# Altium PCB DualBuck(Double).PcbDoc
Units mm, origin at the board's own origin, x right, y up, seen from the top; angles counter-clockwise.
Board outline 92.71 x 77.47 mm, 4 copper layers (Top Layer, GND, PWR, Bottom Layer), stack 0.603 mm thick; 41 components, 27 nets, 143 pads, 53 vias.
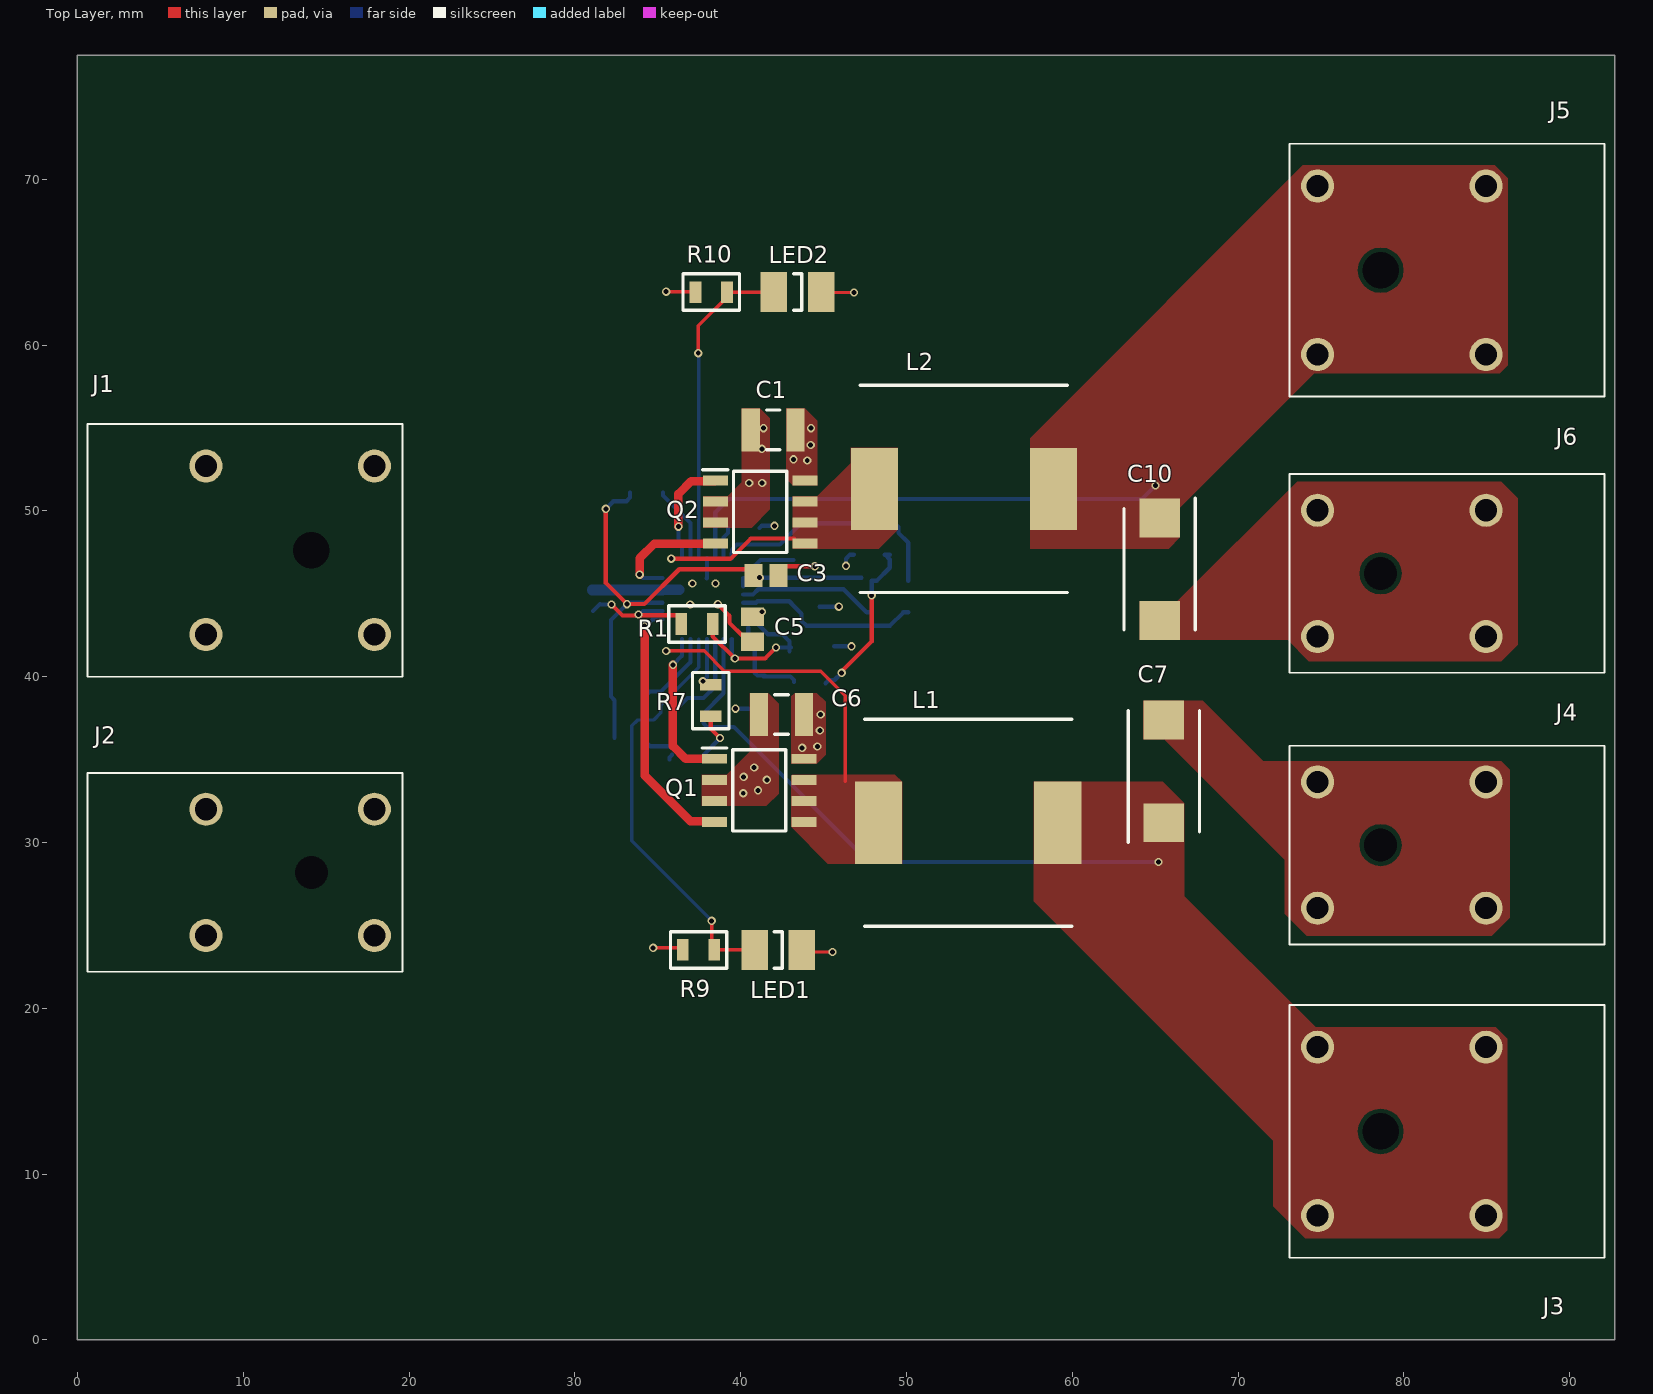
[diagram p0: Top Layer view]
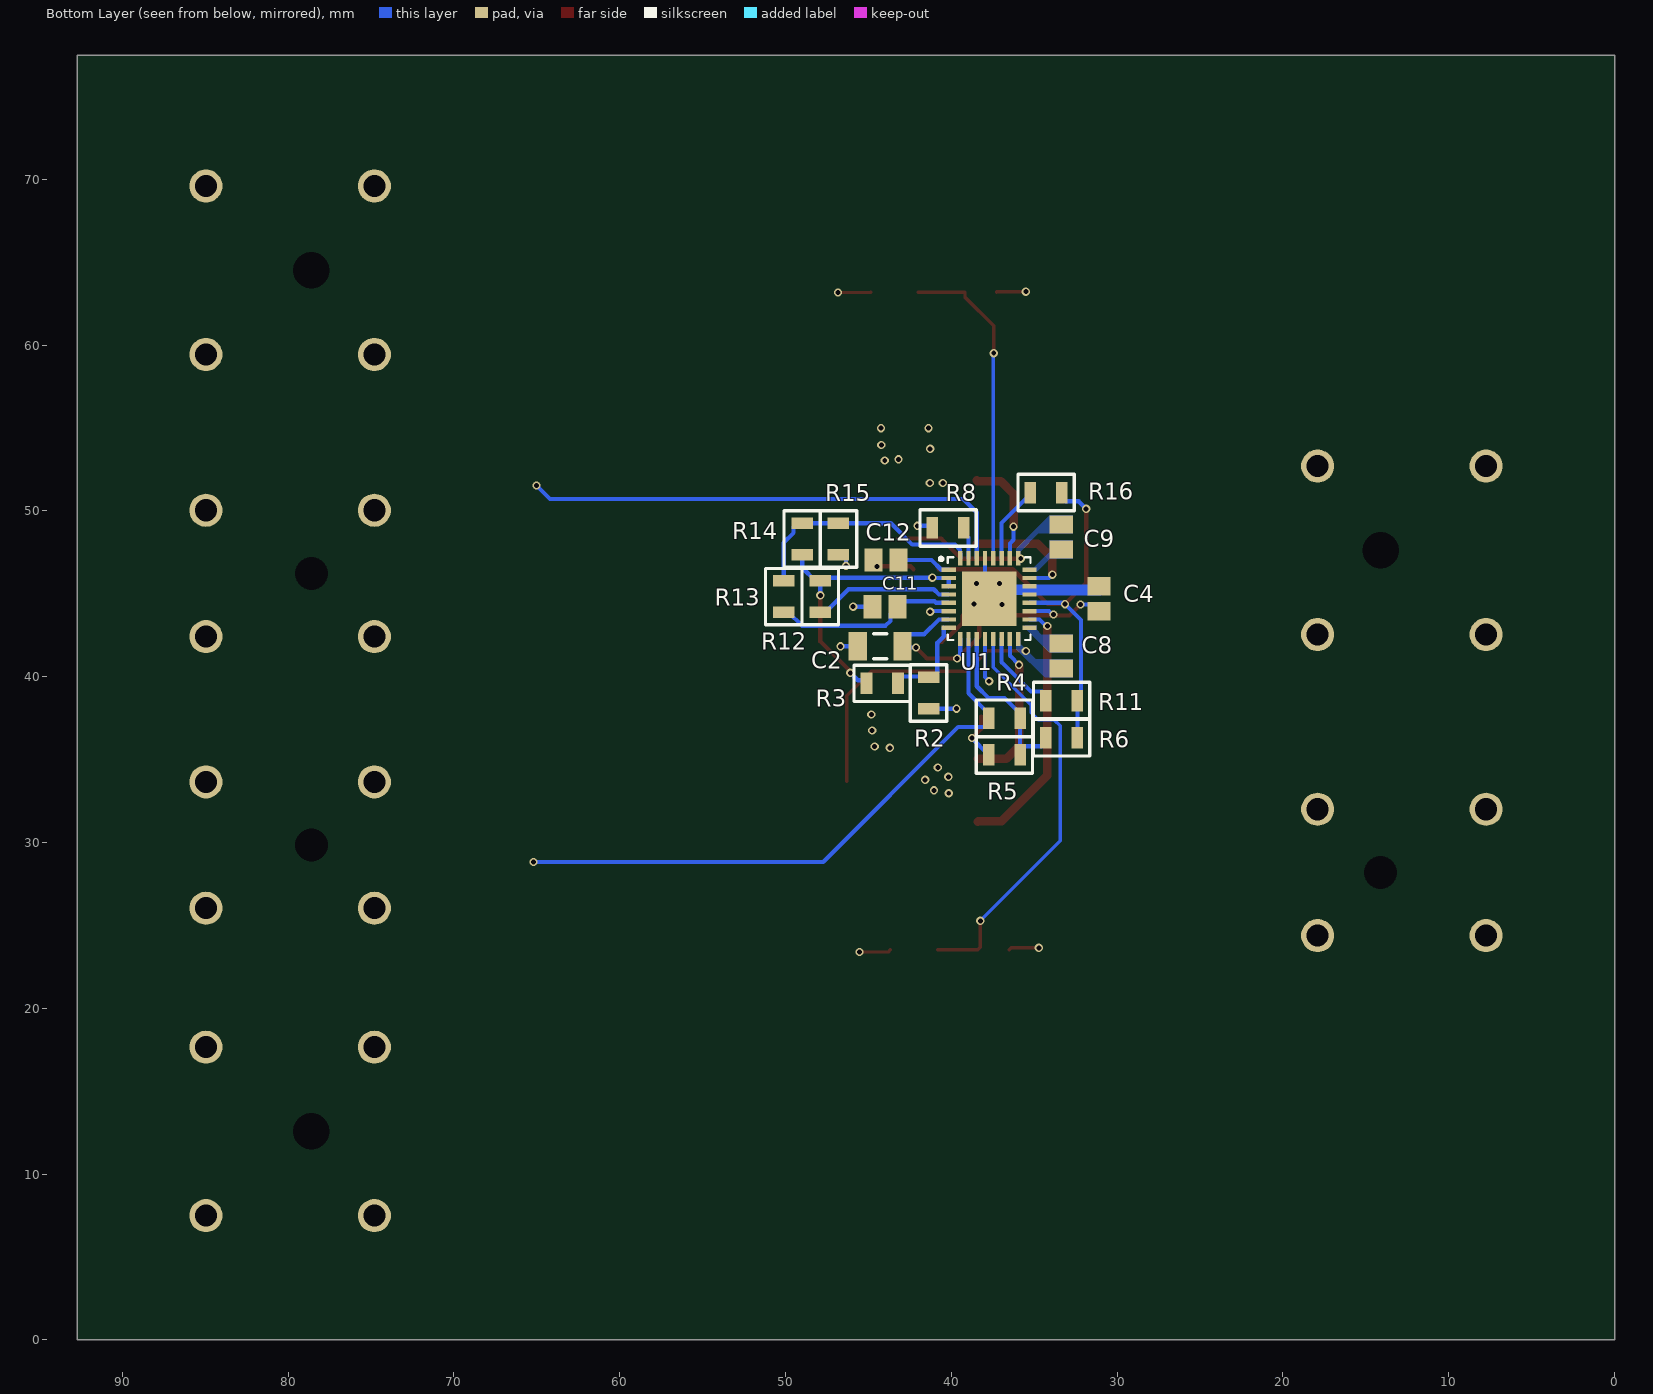
[diagram p1: Bottom Layer view, seen from below]
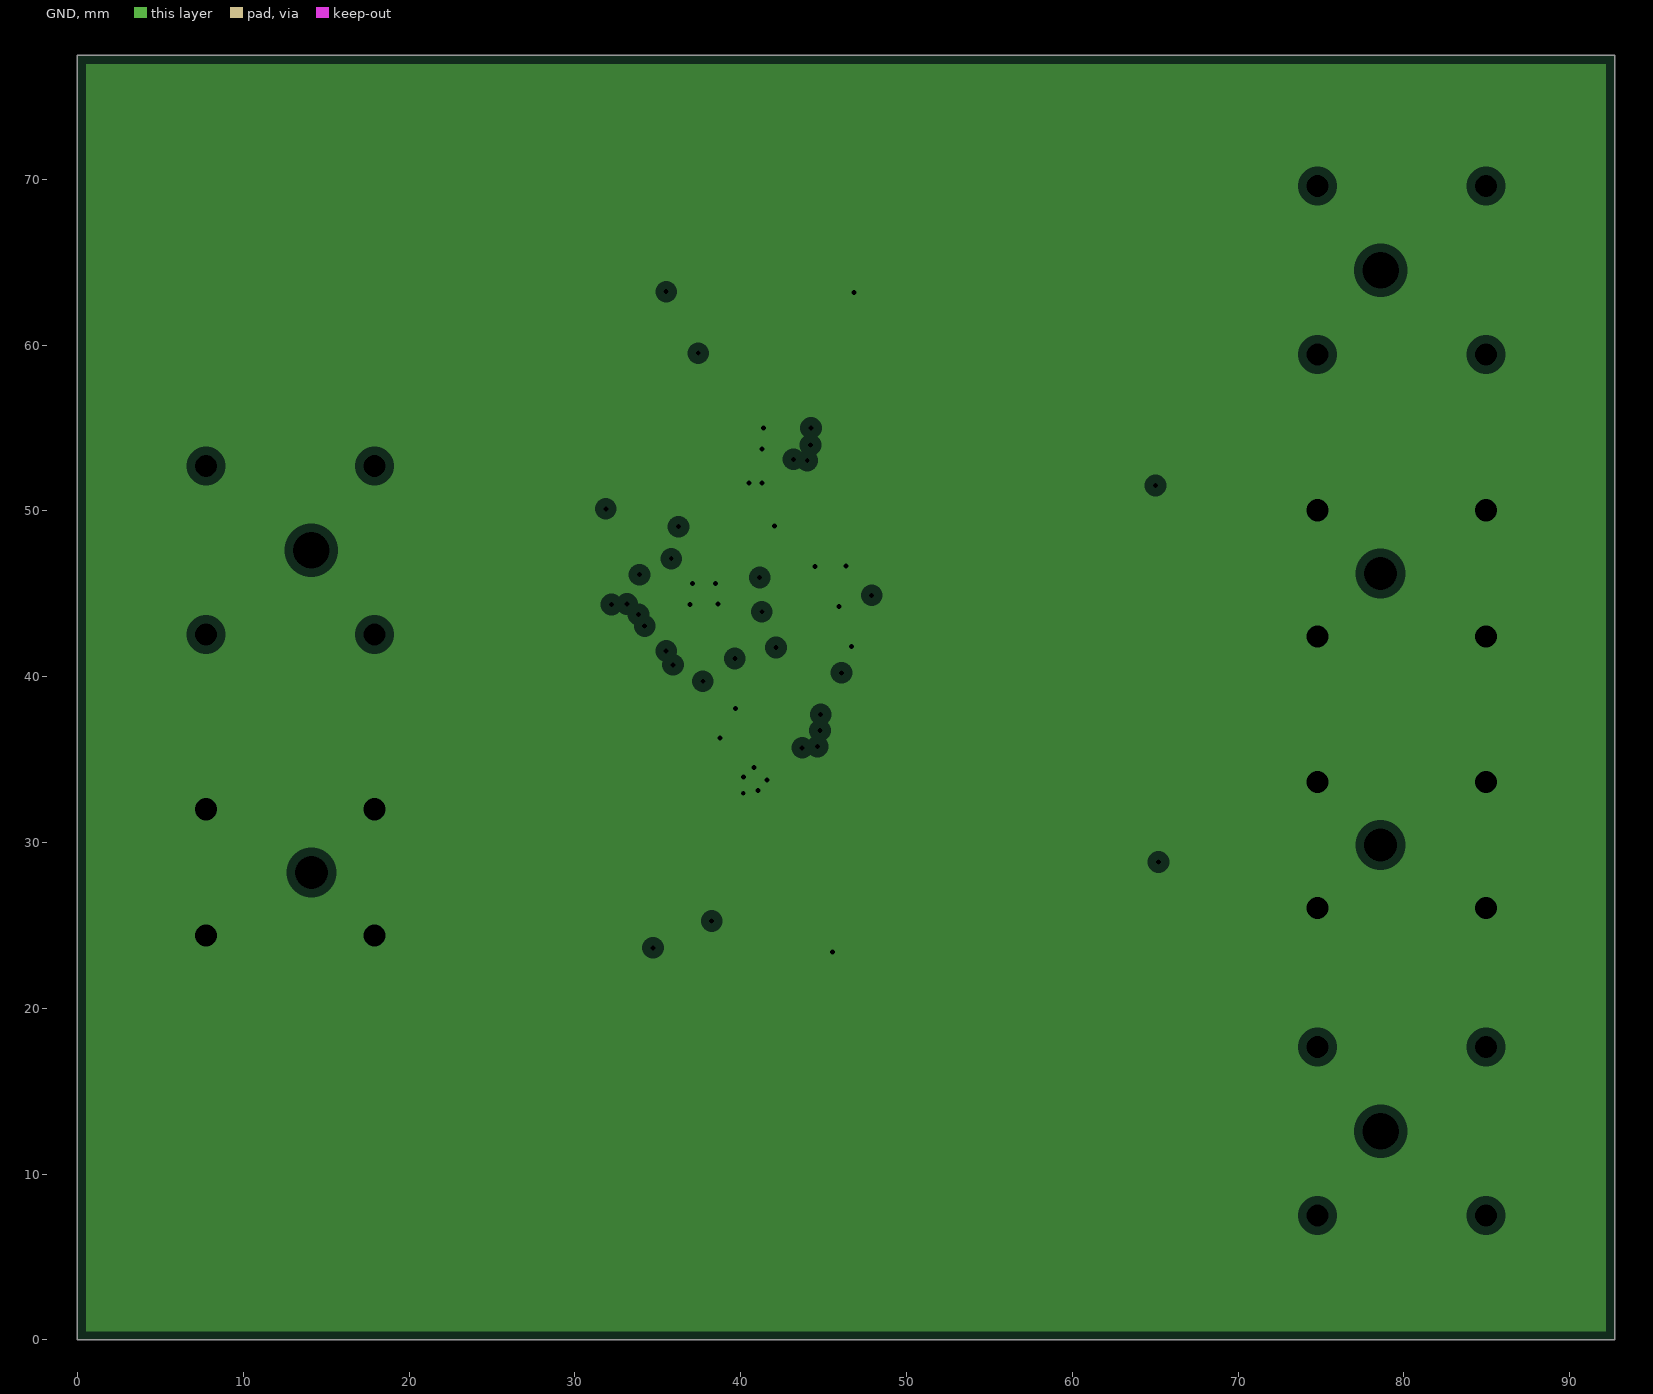
[diagram p2: GND, clearances drawn from the general rule]
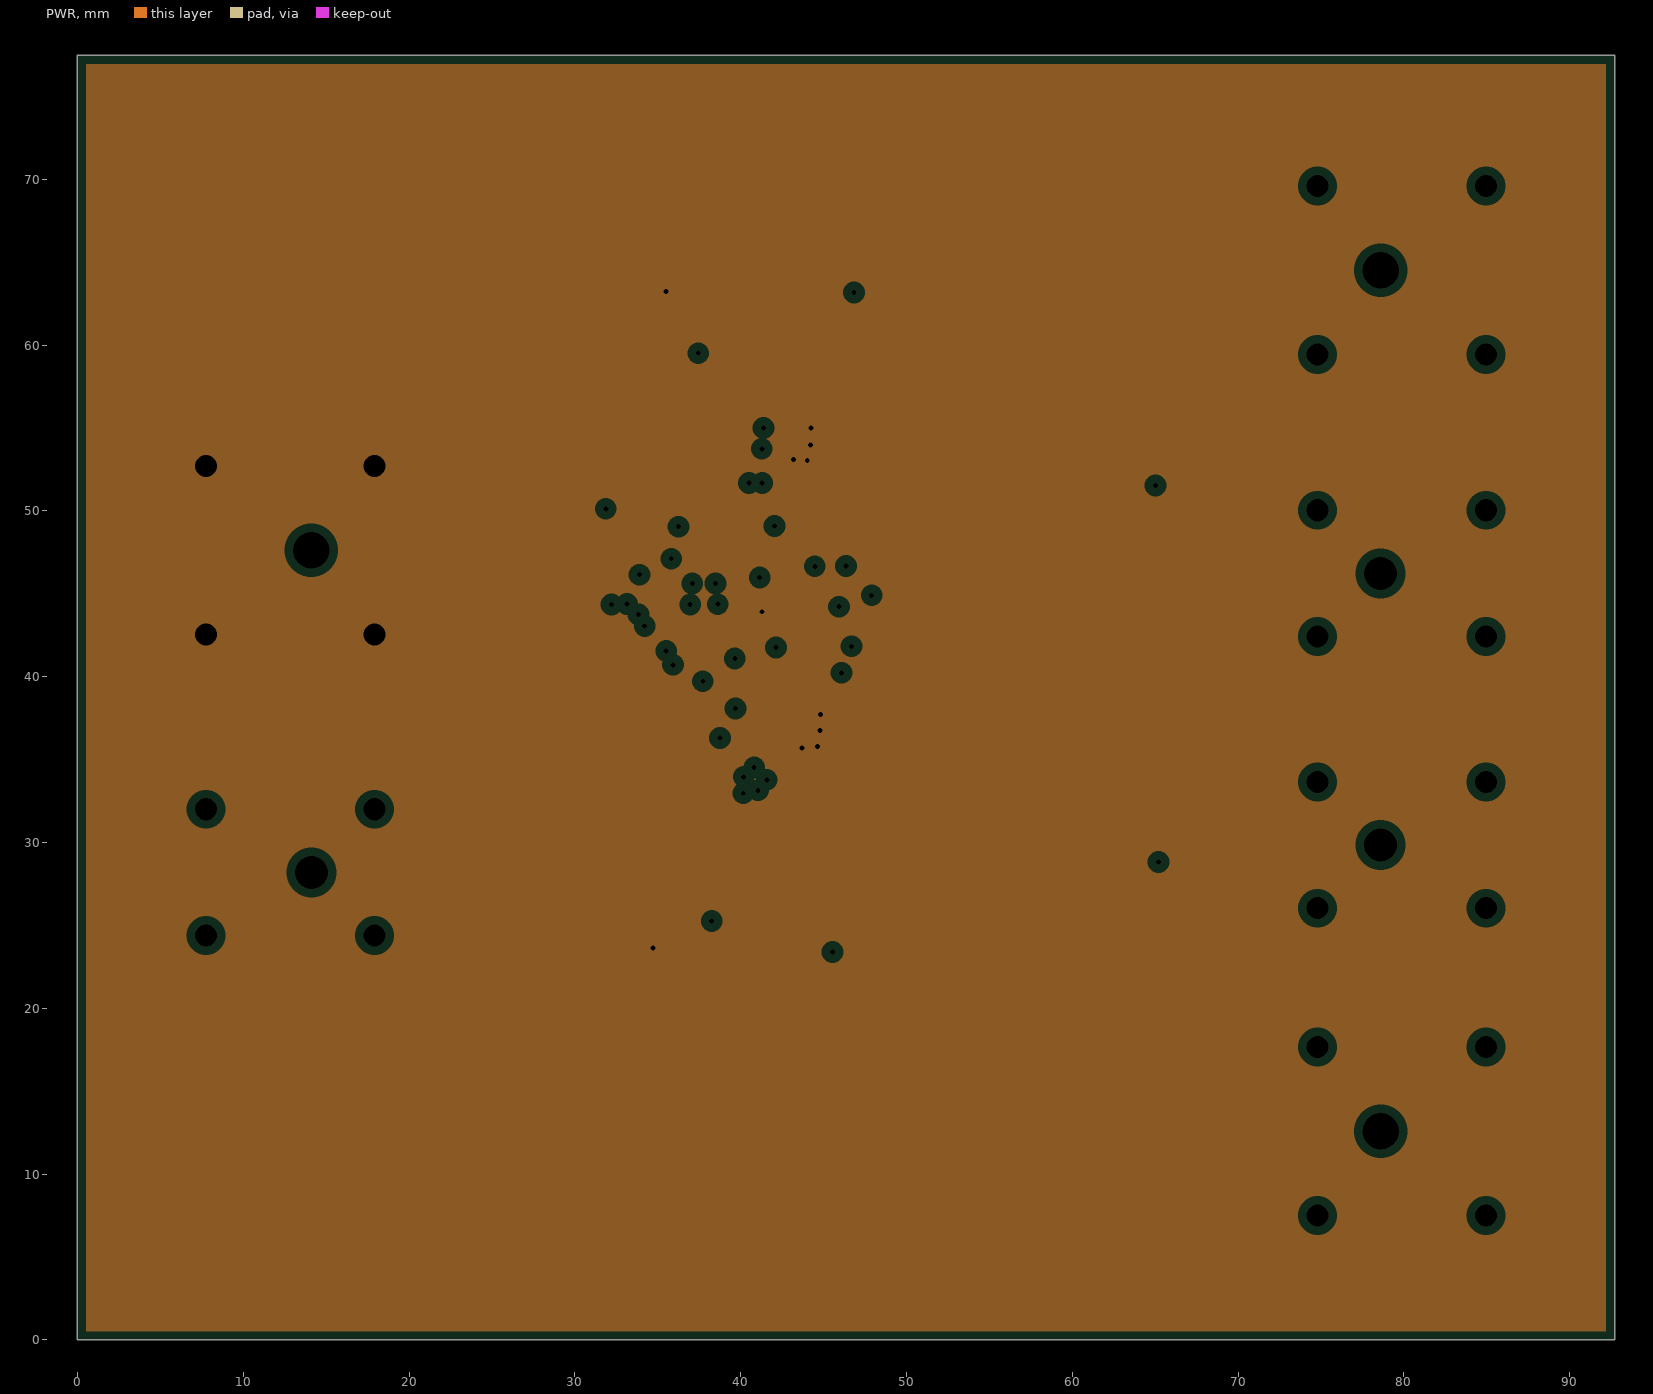
[diagram p3: PWR, clearances drawn from the general rule]
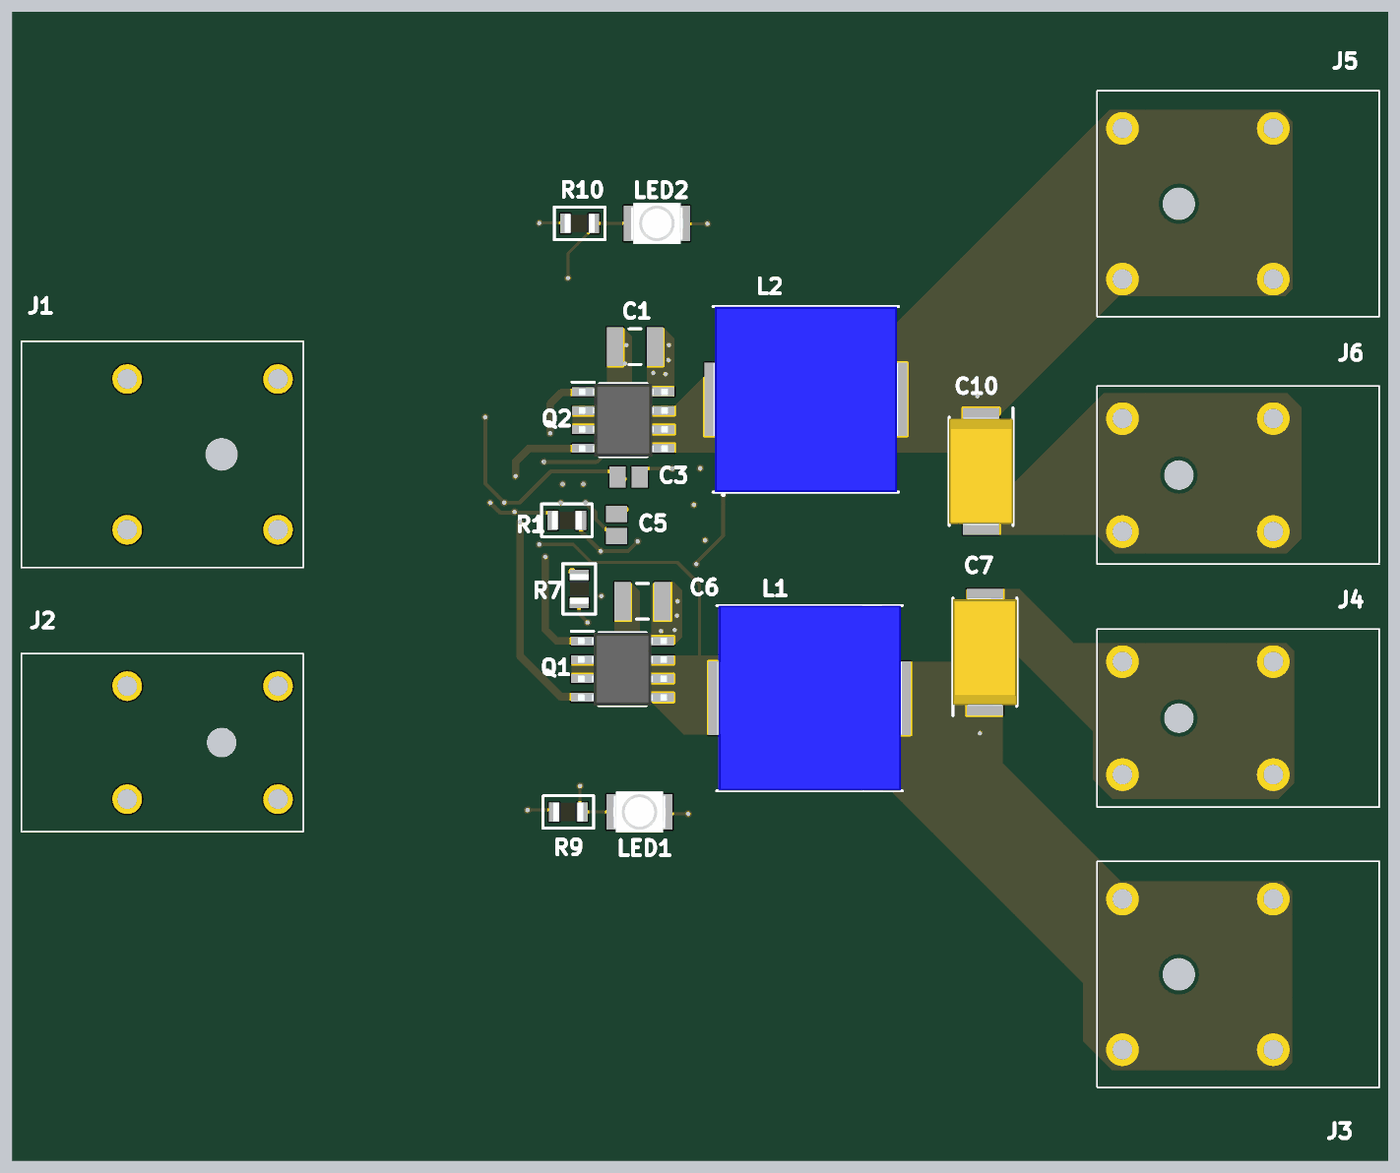
[diagram p4: 3D render of the assembled board from above, using the file's embedded part models]
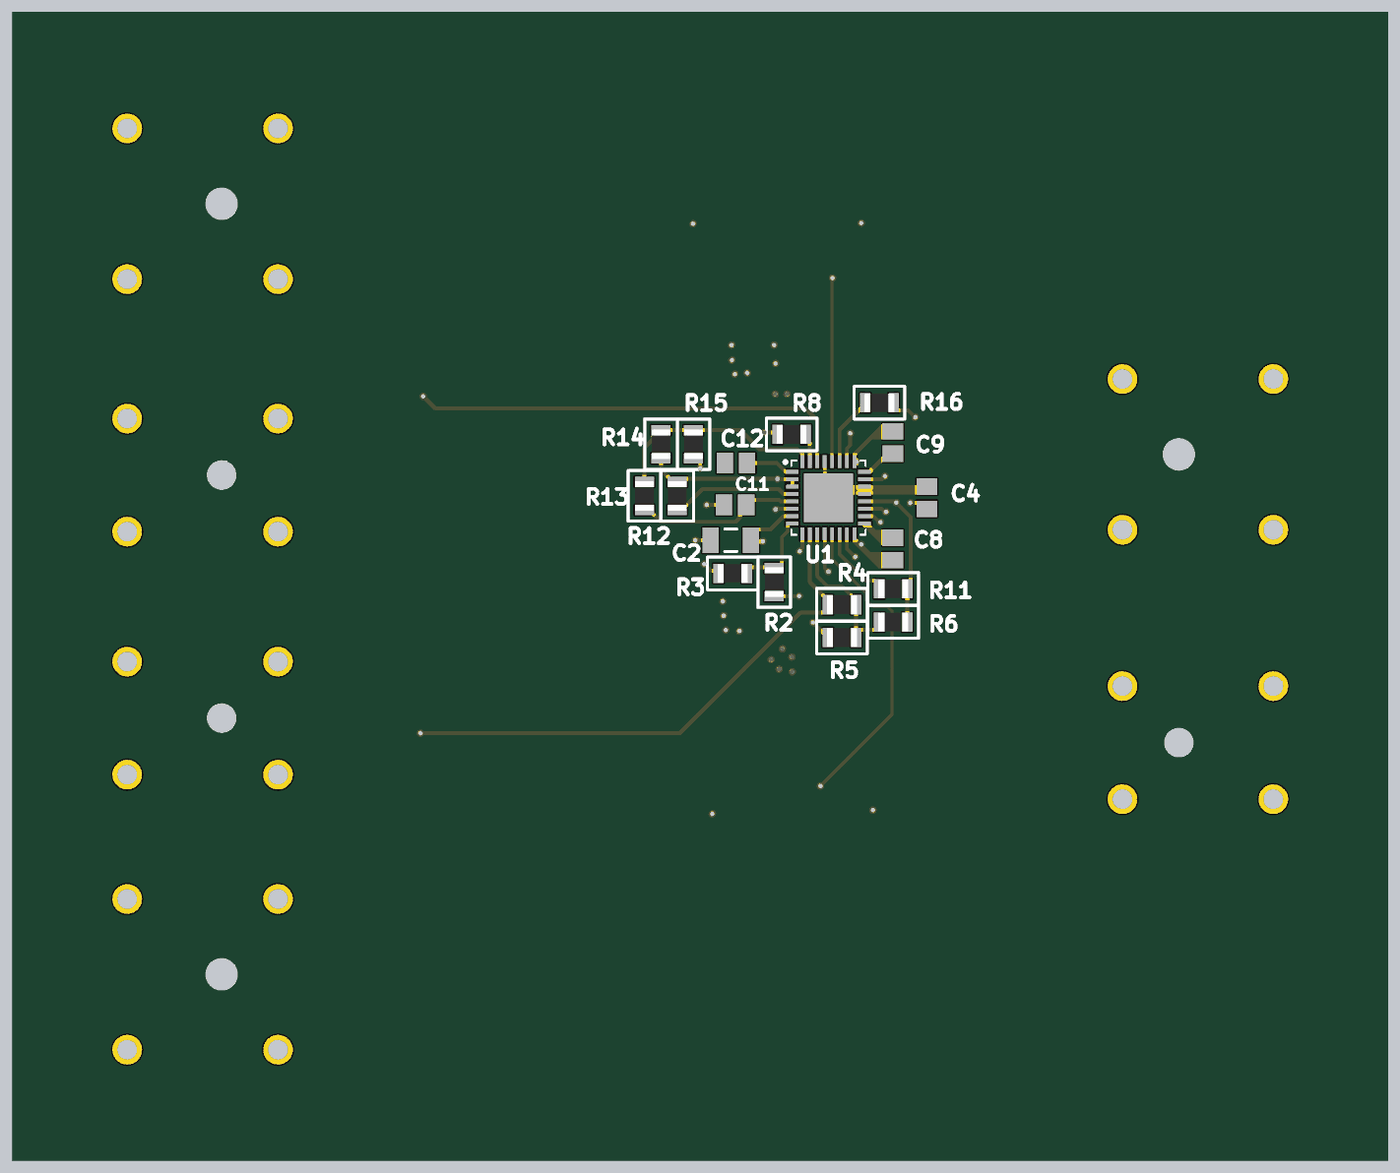
[diagram p5: 3D render of the assembled board from below, using the file's embedded part models]

## Layer stack, top to bottom
Top Solder: solder mask 0.0102, Solder Resist, Dk 3.5
Top Layer: signal copper 0.0356
Dielectric 2: prepreg 0.0711, PP-006, Dk 4.1
GND: plane copper 0.035, net GND
Dielectric 1: dielectric 0.32, FR-4, Dk 4.8
PWR: plane copper 0.035, net +VIN
Dielectric 3: prepreg 0.0711, PP-006, Dk 4.1
Bottom Layer: signal copper 0.0356
Bottom Solder: solder mask 0.0102, Solder Resist, Dk 3.5

## Board outline
0,0 0,77.47 92.71,77.47 92.71,0

## Design rules (kind name [scope] priority, off if disabled: settings)
Clearance [All] p1: gap=0.254 ignorepadtopadclearanceinfootprint=TRUE except(0: Arc-Hole Track-Hole SMDPad-Hole THPad-Hole Via-Hole Fill-Hole Poly-Hole Region-Hole Text-Hole; 0.152: SMDPad-SMDPad; 0.229: Arc-Arc Arc-Track Arc-SMDPad Track-Track Track-SMDPad)
MinimumSolderMaskSliver [All] p1: minsoldermaskwidth=0.1
PlaneClearance [All] p1: clearance=0.508
PlaneConnect [All] p1: planeconnectstyle=Relief reliefexpansion=0.508 reliefentries=4 reliefconductorwidth=0.254 reliefairgap=0.254
PolygonConnect [All] p1: connectstyle=Direct reliefconductorwidth=0.254 reliefentries=4 polygonreliefangle="90 Angle" airgapwidth=0.254
RoutingVias [All] p1: holewidth=0.711 width=1.27 viastyle="Through Hole" minholewidth=0.3 minwidth=0.5 maxholewidth=0.711 maxwidth=1.27
SilkToSolderMaskClearance [IsPad] p1: minsilkscreentomaskgap=0.1 clearancetoexposedcopper=TRUE
SolderMaskExpansion [All] p1: expansion=0.102
Width [All] p1: maxlimit=1.27 minlimit=0.127 preferedwidth=0.254 minimp=50.000000 maximp=50.000000 favimp=50.000000
26 further rules are at their usual default settings.

## Components (designator, comment, footprint, x,y, rotation, side; value= is the part's Value field where it differs from the comment)
C1 "" C1210 41.957,54.889 r0 top value=10uF
C2 "" C1206 44.298,41.834 r180 bottom value=4.7uF
C3 "" C0805 41.529,46.101 r180 top value="1uF, 50V"
C4 "" C0805 31.09,44.704 r270 bottom value=1uF
C5 "" C0805 40.716,42.862 r90 top value=1uF
C6 "" C1210 42.465,37.719 r0 top value=10uF
C7 "330uF, 10V" CAPPM7343X430N 65.532,34.29 r90 top
C8 "" C0805 33.376,41.25 r270 bottom value=100nF
C9 "" C0805 33.376,48.424 r270 bottom value=220nF
C10 "330uF, 10V" CAPPM7343X430N 65.278,46.482 r270 top
C11 "" C0805 44.006,44.221 r180 bottom value=10nF
C12 "" C0805 43.942,47.041 r180 bottom value=100nF
J1 "23.3200-21" 23320021 17.907,42.545 r180 top
J2 "23.3200-22" 23320022 17.907,24.384 r0 top
J3 "23.3200-21" 23320021 74.803,17.653 r0 top
J4 "23.3200-22" 23320022 74.803,33.655 r180 top
J5 "23.3200-21" 23320021 74.803,69.596 r0 top
J6 "23.3200-22" 23320022 74.803,50.038 r180 top
L1 "3.3uH, DR125-3R3-R" INDPM125125X600N 53.721,31.19 r180 top
L2 "2.2uH, DR125-2R2-R" INDPM125125X600N 53.467,51.333 r0 top
LED1 "150141GS73100" 3528 42.263,23.52 r180 top
LED2 "150141GS73100" 3528 43.434,63.195 r180 top
Q1 "SI4816BDY-T1-GE3" SOT127P600X175-8N 41.115,33.147 r0 top
Q2 "SI4816BDY-T1-GE3" SOT127P600X175-8N 41.173,49.936 r0 top
R1 "Res3" R0805 37.363,43.18 r0 top value=0R
R2 "Res3" R0805 41.371,39.014 r90 bottom value=0R
R3 "Res3" R0805 44.171,39.599 r180 bottom value=0R
R4 "Res3" R0805 36.805,37.49 r0 bottom value=1K
R5 "Res3" R0805 36.805,35.281 r180 bottom value=1K
R6 "Res3" R0805 33.35,36.322 r180 bottom value=0R
R7 "Res3" R0805 38.202,38.557 r270 top value=200K
R8 "Res3" R0805 40.193,48.971 r180 bottom value=200K
R9 "Res3" R0805 37.465,23.52 r0 top value=200
R10 "Res3" R0805 38.227,63.195 r0 top value=200
R11 "" R0805 33.35,38.557 r180 bottom value=10K
R12 "Res3" R0805 47.904,44.831 r90 bottom value=10K
R13 "Res3" R0805 50.114,44.831 r90 bottom value=0R
R14 "Res3" R0805 48.997,48.311 r90 bottom value=0R
R15 "Res3" R0805 46.812,48.311 r270 bottom value=0R
R16 "Res3" R0805 34.281,51.105 r180 bottom value=10K
U1 "ISL6236AIRZ" QFN50P500X500X100-33N 37.719,44.704 r180 bottom

## Footprints (in the part's own frame and the unit in brackets; to place one, negate y for a bottom-side part, rotate by r counter-clockwise, add the part's x,y. Pads: shape width x height; smd on the part's side, far side on the other; paste and mask are expansions set on the pad)
3528 [mm] "Chip LED, 2-Leads, Body 3.5x2.8mm, IPC Medium Density"
  rect 1.6x2.4 smd: 1(-1.425,0) 2(1.425,0)
  silkscreen extent -0.25,-1.1 0.25,1.1, body extent -1.75,-1.4 1.75,1.4, height 1.9
23320021 [mm]
  round 1.995 hole 1.33: 1(0,0) 2(0,-10.16) 3(10.16,-10.16) 4(10.16,0)
  round 1.1 hole 2.2 unplated: 5(3.8,-5.08)
  silkscreen extent -1.7,-12.7 17.3,2.54
23320022 [mm]
  round 1.995 hole 1.33: 1(0,0) 2(0,7.62) 3(-10.16,7.62) 4(-10.16,0)
  round 1 hole 2 unplated: MH1(-3.8,3.81)
  silkscreen extent -17.3,-2.19 1.7,9.81
C0805 [mm] "Chip Capacitor, Body 2.0x1.3mm, IPC High Density"
  rect 1.1x1.4 smd: 1(-0.75,0) 2(0.75,0)
  body extent -1.1,-0.72 1.1,0.72, height 1.4
C1206 [mm] "Chip Capacitor, Body 3.2x1.6mm, IPC High Density"
  rect 1.1x1.7 smd: 1(-1.35,0) 2(1.35,0)
  silkscreen extent -0.4,-0.75 0.4,0.75, body extent -1.7,-0.9 1.7,0.9, height 1.3
C1210 [mm] "Chip Capacitor, Body 3.2x2.5mm, IPC High Density"
  rect 1.1x2.6 smd: 1(-1.35,0) 2(1.35,0)
  silkscreen extent -0.4,-1.2 0.4,1.2, body extent -1.7,-1.35 1.7,1.35, height 1.3
CAPPM7343X430N [mm]
  rect 2.35x2.45 smd: 1(-3.1,0) 2(3.1,0)
  silkscreen extent -4.28,-2.15 3.65,2.15, body extent -3.65,-2.15 3.65,2.15, height 4.3
INDPM125125X600N [mm]
  rect 2.85x4.95 smd: 1(-5.4,0) 2(5.4,0)
  silkscreen extent -6.25,-6.25 6.25,6.25, body extent -6.25,-6.25 6.25,6.25, height 6
QFN50P500X500X100-33N [mm]
  rect 0.86x0.26 smd mask+0.13: 1(-2.435,1.75) 2(-2.435,1.25) 3(-2.435,0.75) 4(-2.435,0.25) 5(-2.435,-0.25) 6(-2.435,-0.75) 7(-2.435,-1.25) 8(-2.435,-1.75) 17(2.435,-1.75) 18(2.435,-1.25) 19(2.435,-0.75) 20(2.435,-0.25) 21(2.435,0.25) 22(2.435,0.75) 23(2.435,1.25) 24(2.435,1.75)
  rect 0.26x0.86 smd mask+0.13: 9(-1.75,-2.435) 10(-1.25,-2.435) 11(-0.75,-2.435) 12(-0.25,-2.435) 13(0.25,-2.435) 14(0.75,-2.435) 15(1.25,-2.435) 16(1.75,-2.435) 25(1.75,2.435) 26(1.25,2.435) 27(0.75,2.435) 28(0.25,2.435) 29(-0.25,2.435) 30(-0.75,2.435) 31(-1.25,2.435) 32(-1.75,2.435)
  rect 3.3x3.3 smd mask+0.1: 33(0,0)
  silkscreen extent -3,-2.5 2.5,2.5
R0805 [mm]
  rect 0.7x1.3 smd: 1(-0.95,0) 2(0.95,0)
  silkscreen extent -1.7,-1.1 1.7,1.1, body extent -1,-0.62 1,0.62, height 0.61
SOT127P600X175-8N [mm]
  rect 1.5x0.6 smd: 1(-2.7,1.905) 2(-2.7,0.635) 3(-2.7,-0.635) 4(-2.7,-1.905) 5(2.7,-1.905) 6(2.7,-0.635) 7(2.7,0.635) 8(2.7,1.905)
  silkscreen extent -3.45,-2.45 1.6,2.56, body extent -3,-2.45 3,2.45, height 1.75

## Part data
C1 C2 C3 C4 C5 C6 C8 C9 C11 C12: library part Cap, "Capacitor", LatestRevisionDate=17-Jul-2002, LatestRevisionNote="Re-released for DXP Platform.", PackageDescription="Radial Cap, Thru-Hole; 2 Leads; 0.3 in Pin Spacing", PackageReference=RAD-0.3, Published=8-Jun-2000, Publisher="Altium Limited"
C7 C10: library part T530X337M010ATE004, "Capacitor Polarised", Manufacturer_Name=Kemet, Mouser Part Number=80-T530X337M010ATE4, RS Part Number=6925817, Datasheet Link=http://capacitoredge.kemet.com/capedge2/DataSheet?pn=T530X337M010ATE004, Height=4.3mm, Manufacturer_Part_Number=T530X337M010ATE004, Mouser Price/Stock=https://www.mouser.com/Search/Refine.aspx?Keyword=80-T530X337M010ATE4, RS Price/Stock=https://uk.rs-online.com/web/p/products/6925817
J1 J3 J5: "Connector", Manufacturer_Name="Multi Contact", RS Part Number=4225051, Datasheet Link=https://docs-emea.rs-online.com/webdocs/025b/0900766b8025b994.pdf, Height=11mm, Manufacturer_Part_Number=23.3200-21, RS Price/Stock=http://uk.rs-online.com/web/p/products/4225051
J2 J4 J6: "Connector", Manufacturer_Name="Multi Contact", RS Part Number=4225067, Datasheet Link=http://www.farnell.com/datasheets/2827925.pdf?_ga=2.233889822.1621494036.1565215269-167411096.1502103357, Height=14.9mm, Manufacturer_Part_Number=23.3200-22, RS Price/Stock=http://uk.rs-online.com/web/p/products/4225067
L1: library part DR125-3R3-R, "Inductor", Manufacturer_Name="Cooper Bussmann", RS Part Number=7700974, Datasheet Link=http://www.cooperindustries.com/content/dam/public/bussmann/Electronics/Resources/product-datasheets/Bus_Elx_DS_4315_DR_Series.pdf, Height=6mm, Manufacturer_Part_Number=DR125-3R3-R, RS Price/Stock=https://uk.rs-online.com/web/p/products/7700974
L2: library part DR125-2R2-R, "Inductor", Manufacturer_Name="Cooper Bussmann", RS Part Number=7700968, Datasheet Link=http://www1.cooperbussmann.com/pdf/4a32919a-7470-4ae0-be45-b59e3a1351ef.pdf, Height=6mm, Manufacturer_Part_Number=DR125-2R2-R, RS Price/Stock=https://uk.rs-online.com/web/p/products/7700968
LED1 LED2: "SMD mono-color Top LED, WL-SMTW, Green", Color=Green, ComponentLink1Description="Manufacturer URL", ComponentLink1URL=http://www.we-online.com, ComponentLink2Description=Datasheet, ComponentLink2URL=http://katalog.we-online.com/led/datasheet/150141GS73100.pdf, PackageReference=3528, PartNumber=150141GS73100
Q1 Q2 U1: "Integrated Circuit"
R1 R2 R3 R4 R5 R6 R7 R8 R9 R10 R12 R13 R14 R15 R16: "Resistor", LatestRevisionDate=29-May-2009, LatestRevisionNote="IPC-7351 Footprint Added.", PackageDescription="Chip Resistor", PackageReference=J1-0603, Published=8-Jun-2000, Publisher="Altium Limited"
R11: library part Res3, "Resistor", LatestRevisionDate=29-May-2009, LatestRevisionNote="IPC-7351 Footprint Added.", PackageDescription="Chip Resistor", PackageReference=J1-0603, Published=8-Jun-2000, Publisher="Altium Limited"

## Via types
v1: diameter 0.5, hole 0.3, Top Layer to Bottom Layer, tented both sides, 53 vias

## Nets (pads, with @x,y where several pads share a name; then routed paths per layer and width w, separated by ;. In a path a pad name is that pad's centre, name@x,y a point inside that pad or via, vN(x,y) a via of type N, cw(c..) or ccw(c..) an arc to the next point about the centre after c; other vN are vias at no path point)
"+5V LDO": C2.2 R1.2 U1.7 U1.9 | length 11.6
  Top Layer w0.254: R1.2 38.313,42.433 v1(39.649,41.097) 41.478,41.097 v1(42.139,41.758)
  Bottom Layer w0.254: U1.9 39.469,41.344 39.649,41.164 v1(39.649,41.097) ; U1.7 40.157,43.451 40.747,43.451 41.641,42.557 42.525,42.557 42.948,42.134 C2.2 ; v1(42.139,41.758) C2.2@42.948,41.758 ; C2.2@42.948,41.534 C2.2@42.948,41.758 ; C2.2@42.948,41.758 43.024,41.758 C2.2 ; C2.2@42.948,41.758 C2.2
"+5V PVCC": C4.2 R1.1 U1.19 | length 7.7
  Top Layer w0.254: v1(32.207,44.36) 32.869,43.699 33.793,43.699 v1(33.84,43.746) 33.883,43.703 36.19,43.703 36.19,43.692 36.413,43.469 R1.1
  Bottom Layer w0.254: C4.2 31.513,44.377 31.529,44.36 v1(32.207,44.36) ; v1(33.84,43.746) 33.907,43.746 34.115,43.954 U1.19
+VIN: C1.2 C5.2 C6.2 J1.1 J1.2 J1.3 J1.4 Q1.8 Q2.8 R9.1 R10.1 U1.6 | length 4.8
  Top Layer w0.203: v1(34.722,23.647) 36.388,23.647 R9.1 ; v1(35.509,63.221) 37.252,63.221 R10.1
  Bottom Layer w0.254: U1.6 41.238,43.954 v1(41.275,43.917)
  other v1: 43.713,35.712 44.628,35.789 44.78,36.754 44.831,37.719 44.018,53.035 43.192,53.111 44.221,53.975 44.247,54.991
BOOT1: C8.1 U1.17
BOOT2: C9.2 U1.24
EN1: R11.1 U1.14 | length 5.2
  Bottom Layer w0.254: R11.1@34.3,38.583 34.3,38.883 34.523,39.106 35.197,39.106 36.969,40.877 U1.14
EN2: R16.1 U1.27 | length 4.7
  Bottom Layer w0.254: R16.1@35.316,51.105 35.316,50.932 36.969,49.279 U1.27
"EN LDO": R12.1 U1.4 | length 8.5
  Bottom Layer w0.254: U1.4 40.157,44.957 40.741,44.957 41.061,45.277 46.208,45.277 47.604,43.881 R12.1
FB1: R4.1 R5.2 R6.1 U1.11 | length 10.5
  Bottom Layer w0.254: R6.1@34.326,36.322 34.326,36.022 34.549,35.799 35.925,35.799 35.855,35.869 R4.1 35.855,37.785 36.787,38.717 37.765,38.717 38.469,39.421 U1.11 ; R5.2@35.702,35.011 35.702,35.128 R5.2 R5.2@35.855,35.306
GND: C1.1 C2.1 C3.1 C4.1 C5.1 C6.1 C7.2 C10.2 C11.1 C12.1 J2.1 J2.2 J2.3 J2.4 J4.1 J4.2 J4.3 J4.4 J6.1 J6.2 J6.3 J6.4 LED1.1 LED2.1 Q1.2 Q1.3 Q2.2 Q2.3 R2.1 R5.1 R7.2 R8.1 R15.2 U1.21 U1.22 U1.29 U1.33 | length 24.9
  Top Layer w0.203: LED1.1 43.815,23.393 v1(45.542,23.393) ; LED2.1 44.884,63.17 v1(46.838,63.17)
  Top Layer w0.254: R7.2 38.202,36.855 v1(38.76,36.297) ; v1(38.622,44.374) 39.325,43.671 39.325,43.25 40.157,42.418 40.26,42.418 40.566,42.112 C5.1 C5.1@40.818,42.01 ; C3.1@42.279,46.482 42.457,46.66 v1(44.475,46.66)
  Bottom Layer w0.254: R5.1 38.76,36.286 v1(38.76,36.297) ; U1.33@37.955,45.937 37.966,45.949 37.966,47.136 U1.29 ; v1(39.695,38.075) 39.7,38.07 41.366,38.07 R2.1 ; R8.1 41.27,49.098 v1(42.037,49.098) ; C11.1 v1(45.923,44.221) ; C2.1 v1(46.685,41.834) ; v1(46.355,46.685) 46.355,47.112 46.603,47.361 R15.2 R15.2@46.825,47.374
  Bottom Layer w0.635: C4.1@31.039,45.229 35.284,45.229 ; 35.293,45.237 U1.33@36.297,45.237
  other v1: 40.157,32.969 41.044,33.147 41.58,33.782 40.183,33.96 40.818,34.519 36.957,44.36 37.084,45.618 38.481,45.618 40.513,51.689 41.3,51.689 41.275,53.746 41.377,54.991
ILIM1: R7.1 U1.12 | length 2.6
  Bottom Layer w0.254: v1(37.719,39.726) 37.969,39.976 U1.12
ILIM2: R8.2 U1.31 | length 1.9
  Bottom Layer w0.254: U1.31 38.969,48.397 39.243,48.671 R8.2
LDOREFIN: R2.2 R3.2 U1.8 | length 5.6
  Bottom Layer w0.254: U1.8@40.454,42.954 40.454,42.443 40.854,42.043 40.854,40.238 41.016,40.076 R2.2@41.453,40.076 ; R2.2@41.377,40.015 42.998,40.015 43.221,39.792 R3.2@43.221,39.675
LGATE1: Q1.4 U1.18 | length 15.6
  Top Layer w0.508: v1(34.214,43.054) 34.214,34.033 36.96,31.288 38.369,31.288 Q1.4
  Bottom Layer w0.254: v1(34.214,43.054) 34.281,43.054 34.678,43.451 35.281,43.451 U1.18
LGATE2: Q2.4 U1.23 | length 7.4
  Top Layer w0.508: v1(33.909,46.152) 33.909,47.142 34.798,48.031 Q2.4
  Bottom Layer w0.254: v1(33.909,46.152) 34.107,45.954 U1.23
OUT1: C7.1 J3.1 J3.2 J3.3 J3.4 L1.1 R4.2 U1.10 | length 36.5
  Bottom Layer w0.254: U1.10@38.972,42.266 U1.10 38.969,39.005 37.755,37.79 R4.2 37.755,37.19 37.978,36.967 39.588,36.967 47.727,28.829 v1(65.202,28.829)
OUT2: C10.1 J5.1 J5.2 J5.3 J5.4 L2.2 U1.30 | length 30
  Bottom Layer w0.254: U1.30 38.469,49.913 39.279,50.724 64.211,50.724 v1(65.024,51.537)
PHASE1: C8.2 L1.2 Q1.5 Q1.6 Q1.7 U1.16 | length 17.1
  Top Layer w0.203: v1(35.509,41.554) 37.795,41.554 39.014,40.335 44.831,40.335 46.304,38.862 46.304,33.68
PHASE2: C9.1 L2.1 Q2.5 Q2.6 Q2.7 U1.25 | length 7.9
  Top Layer w0.254: v1(35.814,47.117) 39.37,47.117 39.383,47.13 39.408,47.13 40.615,48.336 43.205,48.336
POK1: LED1.2 R9.2 U1.13 | length 25.5
  Top Layer w0.203: v1(38.252,25.273) 38.252,23.683 R9.2 LED1.2
  Bottom Layer w0.203: U1.13 37.469,40.572 35.174,38.277 35.174,37.816 34.747,37.389 33.782,37.389 33.426,37.033 33.426,30.099 v1(38.252,25.273)
POK2: LED2.2 R10.2 U1.28 | length 19.6
  Top Layer w0.203: v1(37.444,59.512) 37.444,61.162 39.177,62.895 R10.2 LED2.2
  Bottom Layer w0.203: U1.28 v1@37.469,59.538
REF: C12.2 U1.1 | length 3.3
  Bottom Layer w0.254: U1.1 40.612,46.454 41.199,47.041 C12.2
REFIN2: R13.2 R14.2 R15.1 U1.32 | length 14.8
  Bottom Layer w0.254: U1.32 39.469,47.439 39.472,47.442 39.472,47.657 39.78,47.966 42.364,47.966 43.659,49.261 R15.1 R14.2 49.297,49.261 49.52,49.038 49.52,48.677 50.114,48.082 R13.2
UGATE1: Q1.1 U1.15 | length 9.5
  Top Layer w0.508: v1(35.916,40.716) 35.916,35.814 36.678,35.052 Q1.1
  Bottom Layer w0.254: v1(35.916,40.716) 36.469,41.27 U1.15
UGATE2: Q2.1 U1.26 | length 6.6
  Top Layer w0.508: v1(36.246,49.047) 36.246,51.023 37.018,51.795 38.435,51.795 Q2.1@38.481,51.841
  Bottom Layer w0.254: v1(36.246,49.047) 36.246,48.26 36.469,48.037 U1.26
VCC: C3.2 R3.1 R6.2 R11.2 R12.2 R14.1 R16.2 U1.2 U1.3 U1.20 | length 45.3
  Top Layer w0.254: v1(31.868,50.128) 31.868,45.656 v1(33.147,44.377) 34.192,44.377 36.297,46.482 C3.2@40.779,46.482 ; v1@46.091,40.31 47.904,42.123 v1(47.904,44.907)
  Bottom Layer w0.254: v1(31.868,50.128) 32.322,50.582 33.108,50.582 33.331,50.805 R16.2 ; R6.2 R11.2 32.4,38.583 32.182,38.801 32.182,43.412 v1(33.147,44.377) 33.214,44.377 33.291,44.454 U1.20 ; U1.3 U1.2 40.157,45.957 41.131,45.957 v1(41.148,45.974) R12.2@47.295,45.974 ; R3.1 45.309,39.787 45.645,39.787 v1(46.091,40.234) ; v1(47.904,44.907) R12.2 48.204,45.781 48.997,46.573 48.997,47.061 48.697,47.361 R14.1
VREF3: C11.2 R13.1 U1.5 | length 11.2
  Bottom Layer w0.254: U1.5 40.157,44.457 40.923,44.457 41.014,44.548 42.93,44.548 C11.2 43.679,43.798 43.679,43.367 43.967,43.078 49.012,43.078 49.814,43.881 R13.1
pads on no net: J1.5 J2.MH1 J3.5 J4.MH1 J5.5 J6.MH1

## Polygon pours and split planes (outlines as drawn)
PHASE2 on Top Layer "Top Layer-PHASE2" (solid, pour order 14): 43.129,50.876 44.628,50.876 46.634,52.883 46.634,53.797 49.479,53.797 49.479,48.87 48.336,47.727 43.129,47.727
PHASE1 on Top Layer "Top Layer-PHASE1" (solid, pour order 8): 43.104,34.087 43.053,34.036 43.053,30.937 45.263,28.727 49.733,28.727 49.733,33.655 49.301,34.087
GND on Top Layer "Top Layer-GND" (solid, pour order 48): 64.059,42.215 73,42.215 74.27,40.945 85.877,40.945 86.868,41.935 86.868,50.775 85.877,51.765 73.558,51.765 66.345,44.552 64.059,44.552
GND on Top Layer "Top Layer-GND 1" (solid, pour order 46): 64.287,38.557 67.869,38.557 71.526,34.9 85.877,34.9 86.385,34.392 86.385,25.451 85.319,24.384 74.143,24.384 72.822,25.705 72.822,28.956 65.557,36.22 64.287,36.22
+VIN on Top Layer "Top Layer-+VIN" (solid, pour order 10): 42.748,56.185 42.748,51.918 43.129,51.537 44.628,51.537 44.628,55.423 43.866,56.185
+VIN on Top Layer "Top Layer-+VIN 1" (solid, pour order 38): 44.577,34.747 45.136,35.306 45.136,38.481 44.602,39.014 43.256,39.014 43.053,38.811 43.053,34.747
GND on Top Layer "Top Layer-GND 2" (solid, pour order 16): 40.056,56.185 40.056,51.714 39.218,50.876 37.744,50.876 37.744,48.997 40.665,48.997 41.758,50.089 41.758,55.575 41.148,56.185
GND on Top Layer "Top Layer-GND 3" (solid, pour order 20): 37.668,34.087 37.668,32.207 41.554,32.207 42.291,32.944 42.291,38.379 41.656,39.014 40.564,39.014 40.564,35.484 39.167,34.087
OUT1 on Top Layer "Top Layer-OUT1" (solid, pour order 24): 57.683,33.655 65.456,33.655 66.751,32.36 66.751,26.772 74.676,18.847 85.547,18.847 86.233,18.161 86.233,6.604 85.75,6.121 74.066,6.121 72.136,8.052 72.136,12.014 57.683,26.467
OUT2 on Top Layer "Top Layer-OUT2" (solid, pour order 22): 57.455,47.727 65.811,47.727 66.497,48.412 66.497,50.19 74.6,58.293 85.776,58.293 86.258,58.776 86.258,70.053 85.471,70.841 73.914,70.841 57.455,54.381
GND on Top Layer "Top Layer-GND 4" (solid, pour order 18): 40.056,50.546
no net on Top Layer "Top Layer-No Net" (solid, pour order 2): 43.053,34.036
no net on Top Layer "Top Layer-No Net 1" (solid, pour order 0): 43.053,34.036
BOOT1 on Bottom Layer "Bottom Layer-BOOT1" (solid, pour order 44): 32.69,42.545 34.569,42.545 34.849,42.824 34.849,43.078 35.712,43.078 35.712,42.824 35.446,42.824 34.074,41.453 32.664,41.453 32.664,42.546
PHASE2 on Bottom Layer "Bottom Layer-PHASE2" (solid, pour order 32): 32.69,49.733 32.69,48.641 34.747,48.641 35.839,47.549 35.839,46.711 36.093,46.711 36.093,47.701 34.061,49.733
BOOT2 on Bottom Layer "Bottom Layer-BOOT2" (solid, pour order 30): 32.69,47.117 34.061,47.117 34.849,46.33 35.712,46.33 35.712,46.584 35.027,46.584 34.074,47.536 34.074,48.235 32.69,48.235
PHASE1 on Bottom Layer "Bottom Layer-PHASE1" (solid, pour order 28): 32.664,41.046 34.9,41.046 35.839,41.986 35.839,42.697 36.093,42.697 36.093,41.681 34.366,39.954 32.664,39.954
GND on GND (split plane): 92.2,0.51 0.51,0.51 0.51,76.96 92.2,76.96
+VIN on PWR (split plane): 92.2,0.51 0.51,0.51 0.51,76.96 92.2,76.96